# EAGLE board Master - Mask (EAGLE 9.1.3)
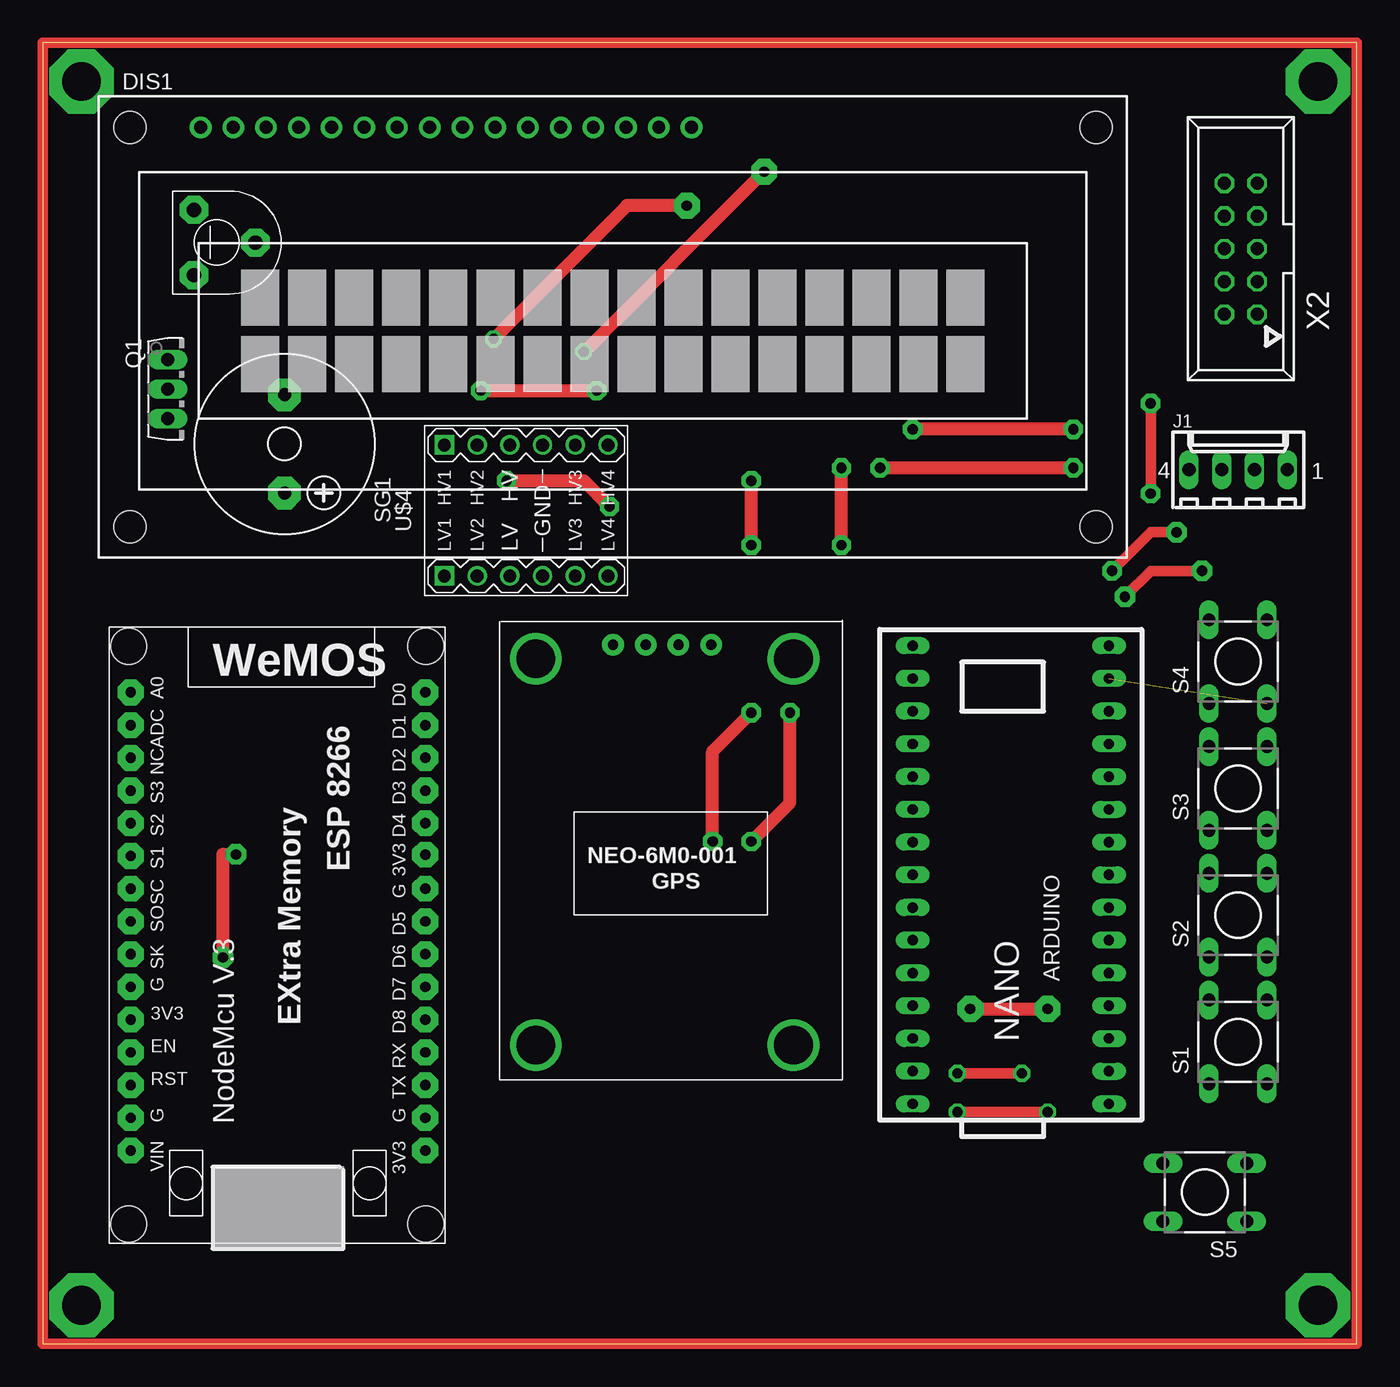
[diagram p0: board, top side]
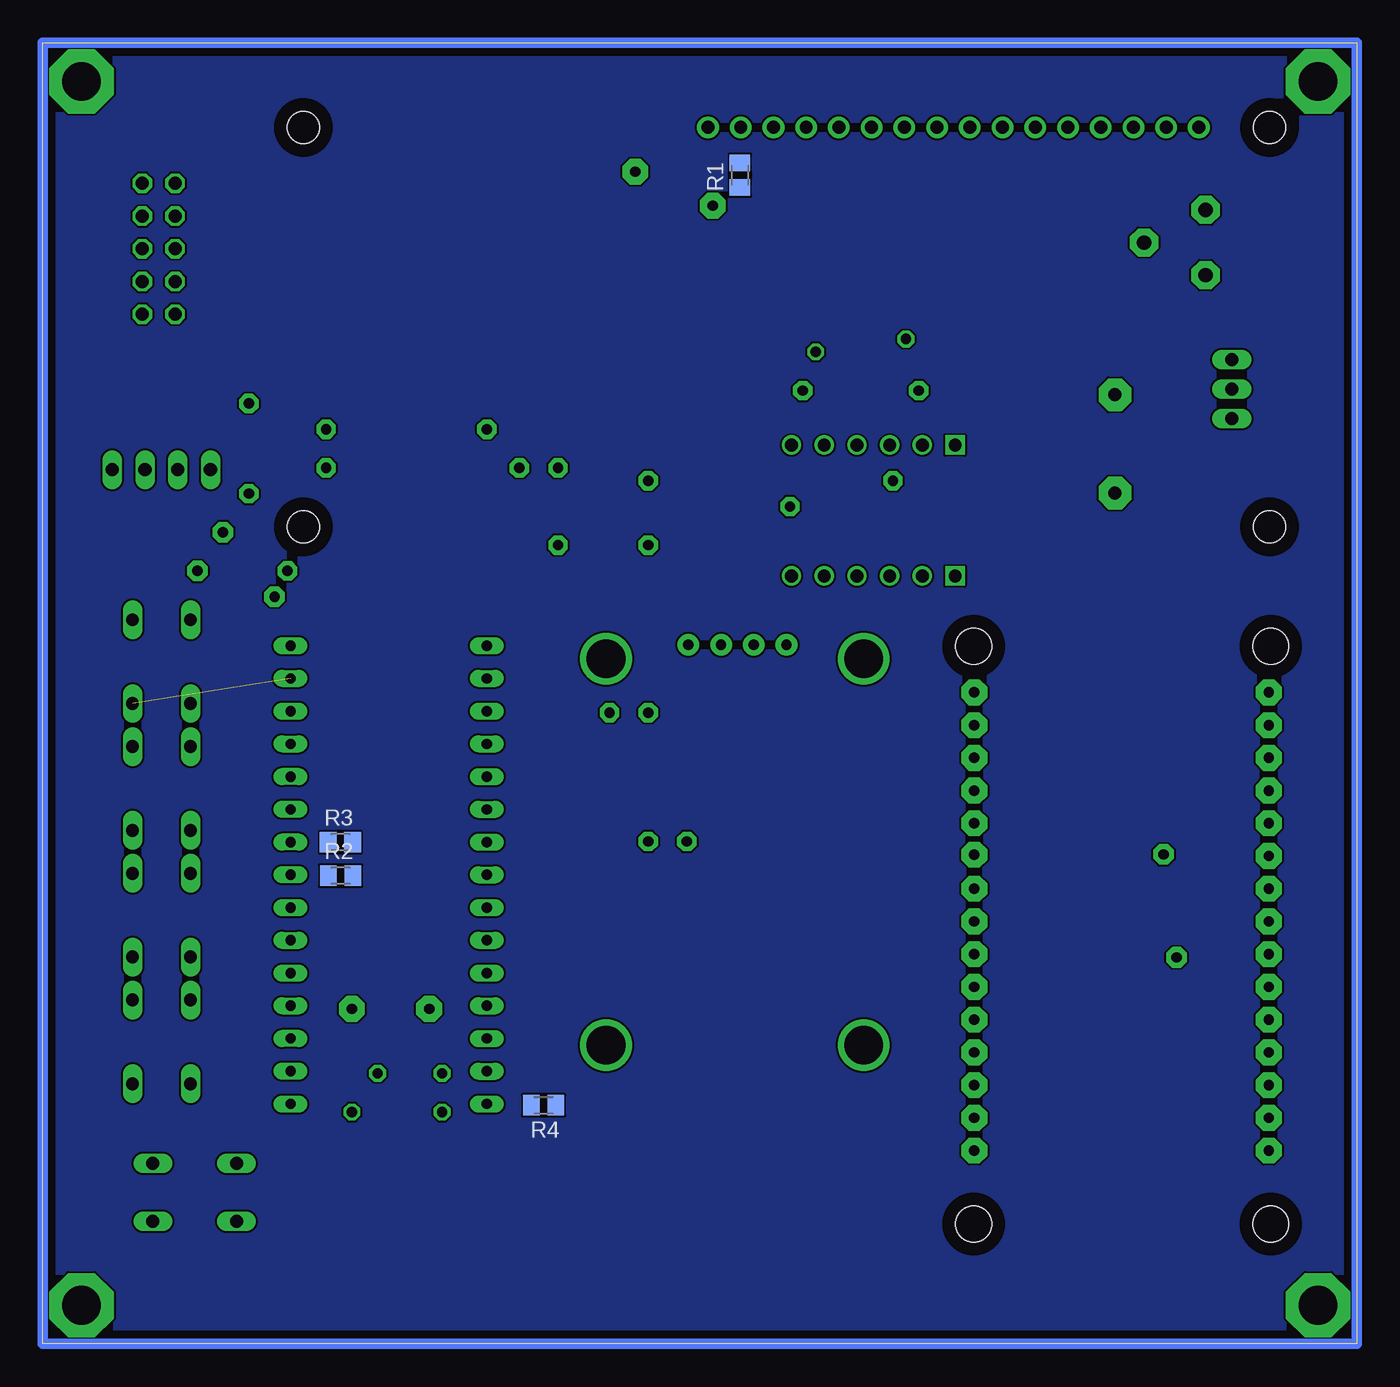
[diagram p1: board, bottom side, seen from below]

Size 102 x 101 mm. Coordinates in mm from the lower left corner, seen from the top.
Outline: 0,0 102,0 102,101 0,101 0,0
Copper layers (1*16): Top 0.035mm / dielectric 1.5mm / Bottom 0.035mm
Design rules "default": minimum track width 6mil, minimum drill 0.35mm, track to track 6mil, track to pad 6mil, pad to pad 6mil, via to via 6mil, smd to smd 6mil, copper to edge 40mil, drill to drill 6mil, minimum pad ring 10mil, minimum via ring 8mil, stop-mask expansion 4mil, vias tented up to drill 0mil, thermal gap 10mil

## Footprints (pad centres in the part's own frame; a part is rotated, then mirrored left to right if it is on the bottom)
TUXGR_16X2_R2 = drill 1 pad 1.676: 1 -32,15.5; 2 -29.46,15.5; 3 -26.92,15.5; 4 -24.38,15.5; 5 -21.84,15.5; 6 -19.3,15.5; 7 -16.76,15.5; 8 -14.22,15.5; 9 -11.68,15.5; 10 -9.14,15.5; 11 -6.6,15.5; 12 -4.06,15.5; 13 -1.52,15.5; 14 1.02,15.5; 15 3.56,15.5; 16 6.1,15.5 | hole 2.5: -37.5,-15.5; 37.5,-15.5; -37.5,15.5; 37.5,15.5
LOLINV3 = drill 0.8 pad 2 octagon: 3 -5.18,11.43; 3V 17.78,11.43; 3V3 7.62,-11.43; A0 -17.78,-11.43; ADC -15.24,-11.43; D0 -17.78,11.43; D1 -15.24,11.43; D2 -12.7,11.43; D3 -10.16,11.43; D4 -7.62,11.43; D5 0,11.43; D6 2.54,11.43; D7 5.08,11.43; D8 7.62,11.43; EN 10.16,-11.43; GND -2.54,11.43; GND1 15.24,11.43; GND2 15.24,-11.43; GND3 5.08,-11.43; NC -12.7,-11.43; RST 12.7,-11.43; RX 10.16,11.43; S1 -5.08,-11.43; S2 -7.62,-11.43; S3 -10.16,-11.43; SC -2.54,-11.43; SK 2.54,-11.43; SO 0,-11.43; TX 12.7,11.43; VIN 17.78,-11.43 | hole 2.8: 23.48,11.49; 23.48,-11.581; -21.36,-11.581; -21.36,11.49
6410-04 = drill 1.016 long: 1 3.81,0; 2 1.27,0; 3 -1.27,0; 4 -3.81,0
TO126AV = drill 1.016 long: B 2.286,-1.27; C 0,-1.27; E -2.286,-1.27
M0805 = smd 1.3 x 1.6: 1 -0.95,0; 2 0.95,0
DTS-6 = drill 1 long: 1 -3.25,2.25; 2 3.25,2.25; 3 -3.25,-2.25; 4 3.25,-2.25
F/CM12P = drill 1.016 pad 2.54 octagon: + 3.81,0; - -3.81,0
NANO = drill 0.8 long: 3.3V -7.62,13.97; 5V -7.62,-11.43; A0 -7.62,8.89; A1 -7.62,6.35; A2 -7.62,3.81; A3 -7.62,1.27; A4 -7.62,-1.27; A5 -7.62,-3.81; A6 -7.62,-6.35; A7 -7.62,-8.89; AREF -7.62,11.43; D2 7.62,-8.89; D3 7.62,-6.35; D4 7.62,-3.81; D5 7.62,-1.27; D6 7.62,1.27; D7 7.62,3.81; D8 7.62,6.35; D9 7.62,8.89; D10 7.62,11.43; D11 7.62,13.97; D12 7.62,16.51; D13 -7.62,16.51; GND -7.62,-16.51; GND1 7.62,-11.43; RAW -7.62,-19.05; RST -7.62,-13.97; RST1 7.62,-13.97; RX1 7.62,-16.51; TX0 7.62,-19.05
TRIMPOT = drill 1.1 pad 2.184 octagon: 1 -2.538,1.271; 2 0,-3.5; 3 2.536,1.271
LEVEL-SHIFTER-4CH = drill 1 square: J1.1 -5.08,6.35; J2.1 5.08,6.35 | drill 1: J1.2 -5.08,3.81; J1.3 -5.08,1.27; J1.4 -5.08,-1.27; J1.5 -5.08,-3.81; J1.6 -5.08,-6.35; J2.2 5.08,3.81; J2.3 5.08,1.27; J2.4 5.08,-1.27; J2.5 5.08,-3.81; J2.6 5.08,-6.35
GY-GPS6MV2 = drill 0.8 pad 1.676: GND 2.626,13.987; RX -2.454,13.987; TX 0.086,13.987; VCC -4.994,13.987 | drill 3: P$1 -10.985,12.898; P$2 9.015,12.898; P$3 -10.985,-17.102; P$4 9.015,-17.102
057-010-1 = drill 1 octagon: 1 -5.08,-1.27; 2 -5.08,1.27; 3 -2.54,-1.27; 4 -2.54,1.27; 5 0,-1.27; 6 0,1.27; 7 2.54,-1.27; 8 2.54,1.27; 9 5.08,-1.27; 10 5.08,1.27

## Placement (x,y rotation side)
DIS1  TUXGR_16X2_R2  [TUXGR_16X2_R2]  44.26,78.93 0 top
IC1  [LOLINV3]  18.26,32.79 270 top
J1  22-27-2041-04  [6410-04]  92.79,67.85 0 top
Q1  BD139  [TO126AV]  10.97,74.12 270 top
R1  [M0805]  47.89,90.72 90 bottom
R2  [M0805]  78.88,36.34 0 bottom
R3  [M0805]  78.89,38.94 0 bottom
R4  [M0805]  63.13,18.53 180 bottom
S1  DTS-6  [DTS-6]  92.78,23.44 90 top
S2  DTS-6  [DTS-6]  92.78,33.28 90 top
S3  DTS-6  [DTS-6]  92.78,43.12 90 top
S4  DTS-6  [DTS-6]  92.78,52.96 90 top
S5  DTS-6  [DTS-6]  90.2,11.78 180 top
SG1  F/CM12P  [F/CM12P]  18.77,69.86 270 top
U$1  NANO  [NANO]  75.14,35.14 180 top
U$2  TRIMPOT  [TRIMPOT]  13.01,85.49 90 top
U$4  LEVEL-SHIFTER-4CH  [LEVEL-SHIFTER-4CH]  37.53,64.69 90 top
U$5  GY-GPS6MV2  [GY-GPS6MV2]  49.26,40.29 0 top
X2  057-010-1  [057-010-1]  93,85 90 top

## Library data of the parts
DIS1 = display-lcd; OC_FARNELL: unknown; OC_NEWARK: unknown
IC1 = NodeMCU Extra Memory
J1 = con-molex; MF: MOLEX; OC_FARNELL: unknown; OC_NEWARK: unknown
Q1 = transistor-power
R1-R4 = rcl; SPICEPREFIX: R
S1-S5 = switch-tact
SG1 = buzzer; OC_FARNELL: unknown; OC_NEWARK: unknown
U$1 = Arduino-clone
U$2 = trimpot
U$4 = GPS neo6mv2
U$5 = GY-GPS6MV2
X2 = con-panduit; OC_FARNELL: unknown; OC_NEWARK: unknown

## Nets
S$10: S4.3 U$1.GND

## Tracks (layer width: path | path; a pad name or v marks a point on that pad's centre or on a via)
3.3  (via drill 0.8 pad 2)
  Top 1.016: v72,26 v78,26
GND  (via drill 0.8 pad 1.3, 0.8 pad 2)
  Top 1.016: v42,77 55.98,90.98 v56,90.98
N$5
  Bottom 0.813: 0,101 102,101 102,0 0,0 0,101
N$6
  Top 0.813: 0,101 102,101 102,0 0,0 0,101
N$7  (via drill 3 pad 5)
  other vias: 99,98
N$8  (via drill 3 pad 5)
  other vias: 3,98
N$9  (via drill 3 pad 5)
  other vias: 3,3
N$10  (via drill 3 pad 5)
  other vias: 99,3
RX  (via drill 0.8 pad 1.5)
  Top 1.016: v36,67 42,67 v44,65
S$4  (via drill 0.8 pad 1.3, 0.8 pad 2)
  Top 1.016: v50,88.35 45.35,88.35 v35,78
S$6  (via drill 0.8 pad 1.6)
  Top 1.016: v15,38 14,38 v14,30
S$10  (1 unrouted)
S$25  (via drill 0.8 pad 1.3)
  Top 0.813: v76,21 v71,21
S$26  (via drill 0.8 pad 1.5)
  Top 1.016: v55,49 52,46 v52,39
S$28  (via drill 0.8 pad 1.5)
  Top 1.016: v58,49 58,42 v55,39
S$29  (via drill 0.8 pad 1.5)
  Top 1.016: v62,62 v62,68
S$32  (via drill 0.8 pad 1.5, 0.8 pad 1.6)
  Top 0.813: v88,63 86,63 v83,60
S$34  (via drill 0.8 pad 1.5)
  Top 0.813: v86,66 v86,73
S$42  (via drill 0.8 pad 1.5)
  Top 1.016: v80,68 v65,68
S$44  (via drill 0.8 pad 1.5)
  Top 1.016: v34,74 v43,74
S$47  (via drill 0.8 pad 1.6)
  Top 0.813: v90,60 86,60 v84,58
S$55  (via drill 0.8 pad 1.3)
  Top 0.813: v78,18 v71,18
TX  (via drill 0.8 pad 1.5)
  Top 1.016: v80,71 v67.52,71
TX1  (via drill 0.8 pad 1.5)
  Top 1.016: v55,62 v55,67
Y
  pour Bottom: 0,101 102,101 102,0 0,0

## Text on the board
tSilk: LCD 16x2 | I2C | Buzzer | Serial Com | RX | TX | VCC | GND | Btn 1 | MODUL GPS | Btn 2 | Btn 3 | Btn 4 | Smart Disaster | Companion | Reset